# Altium PCB PCB1.PcbDoc
Units mm, origin at the board's own origin, x right, y up, seen from the top; angles counter-clockwise.
Board outline 48.54 x 47.62 mm, 2 copper layers (Top Layer, Bottom Layer); 38 components, 34 nets, 197 pads, 33 vias.
Unrouted connection lines stored in the file: 2.
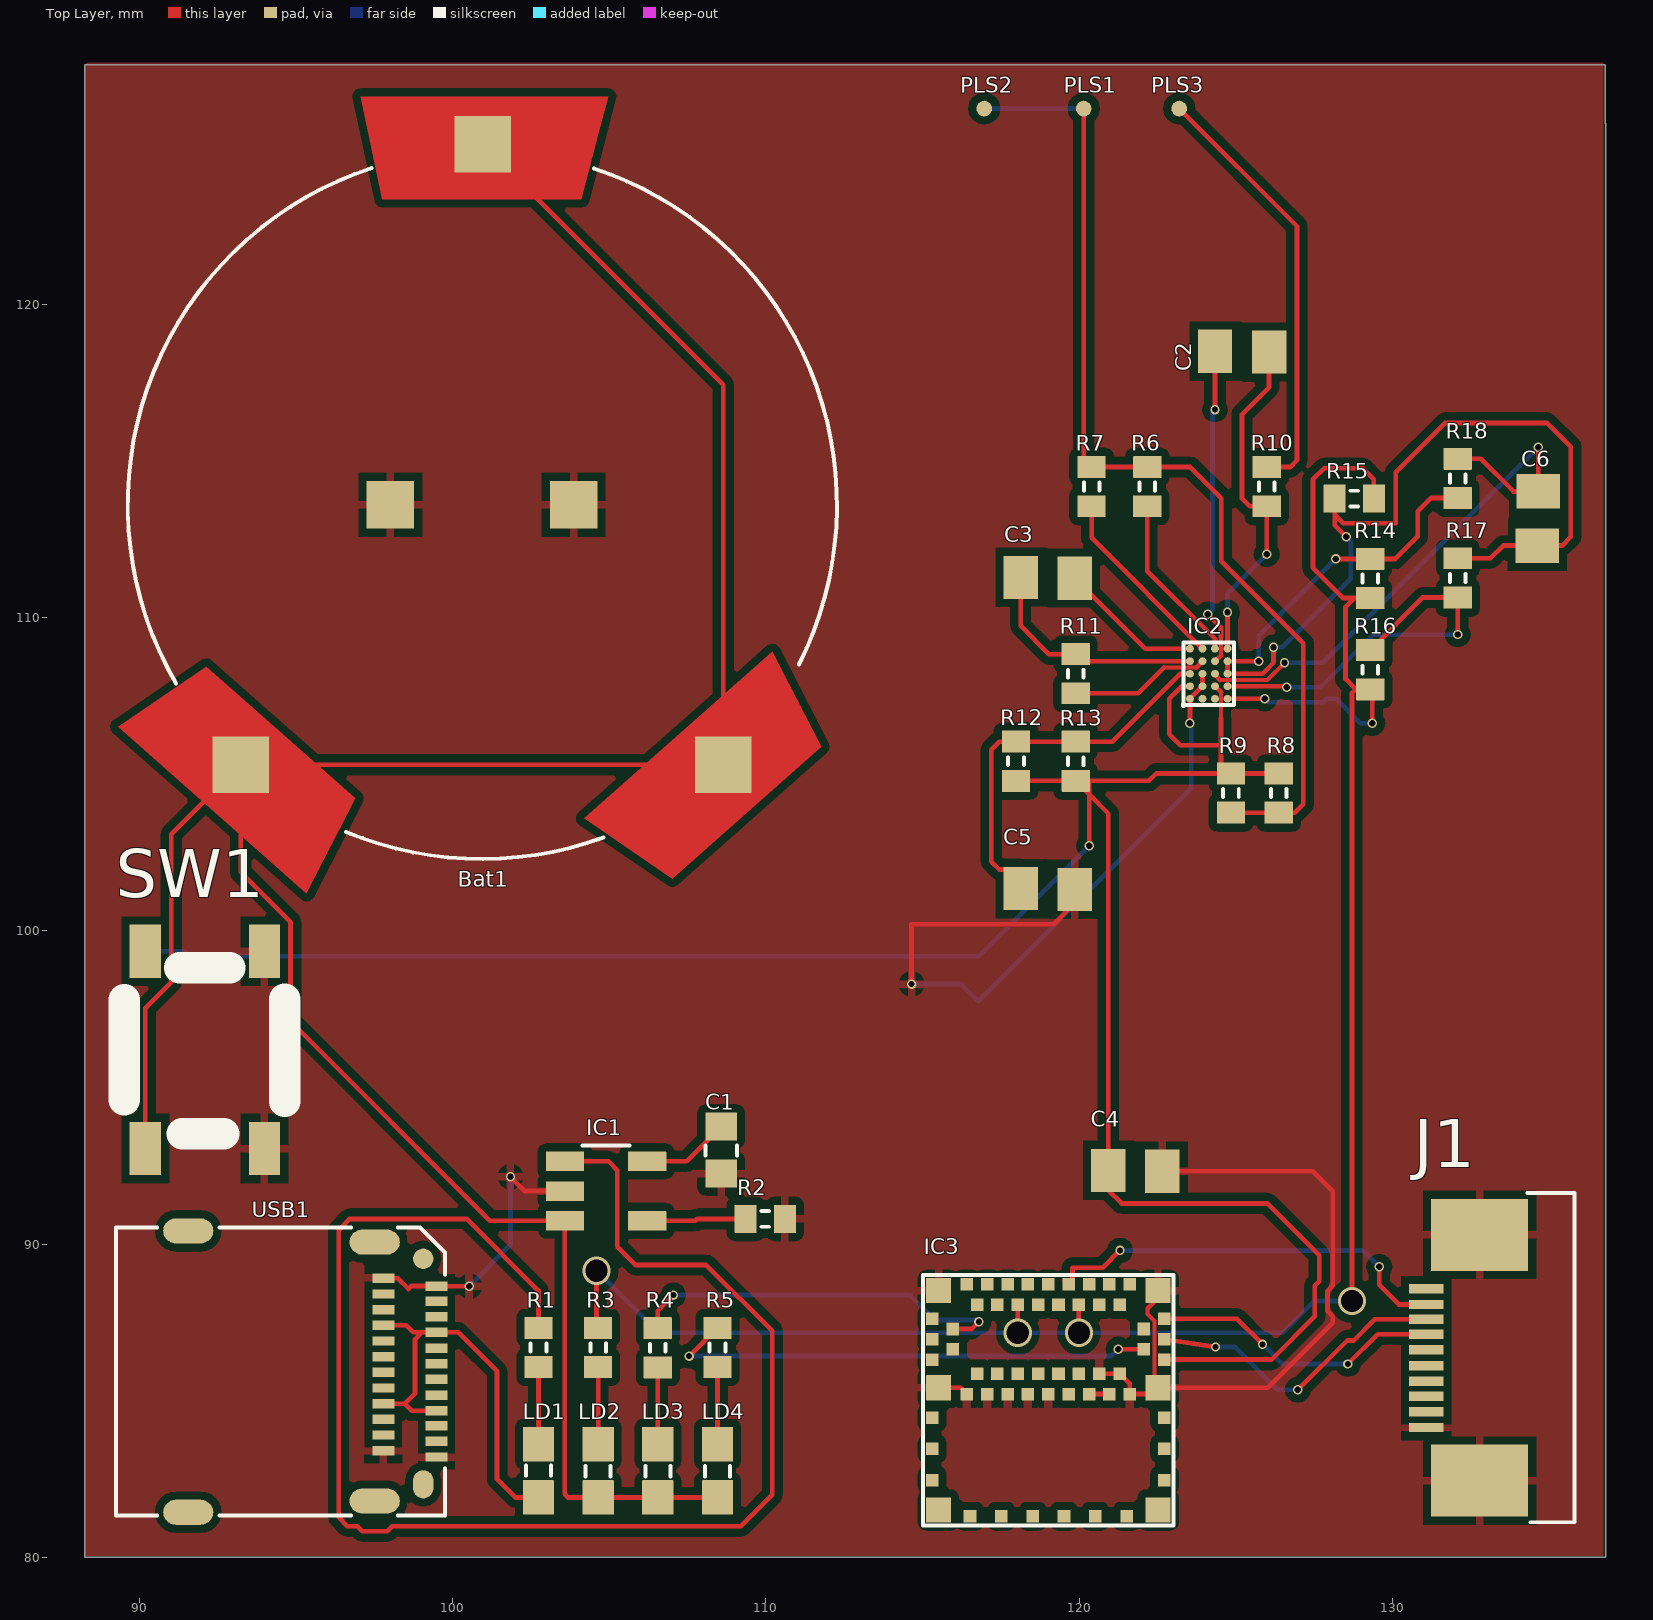
[diagram p0: Top Layer view]
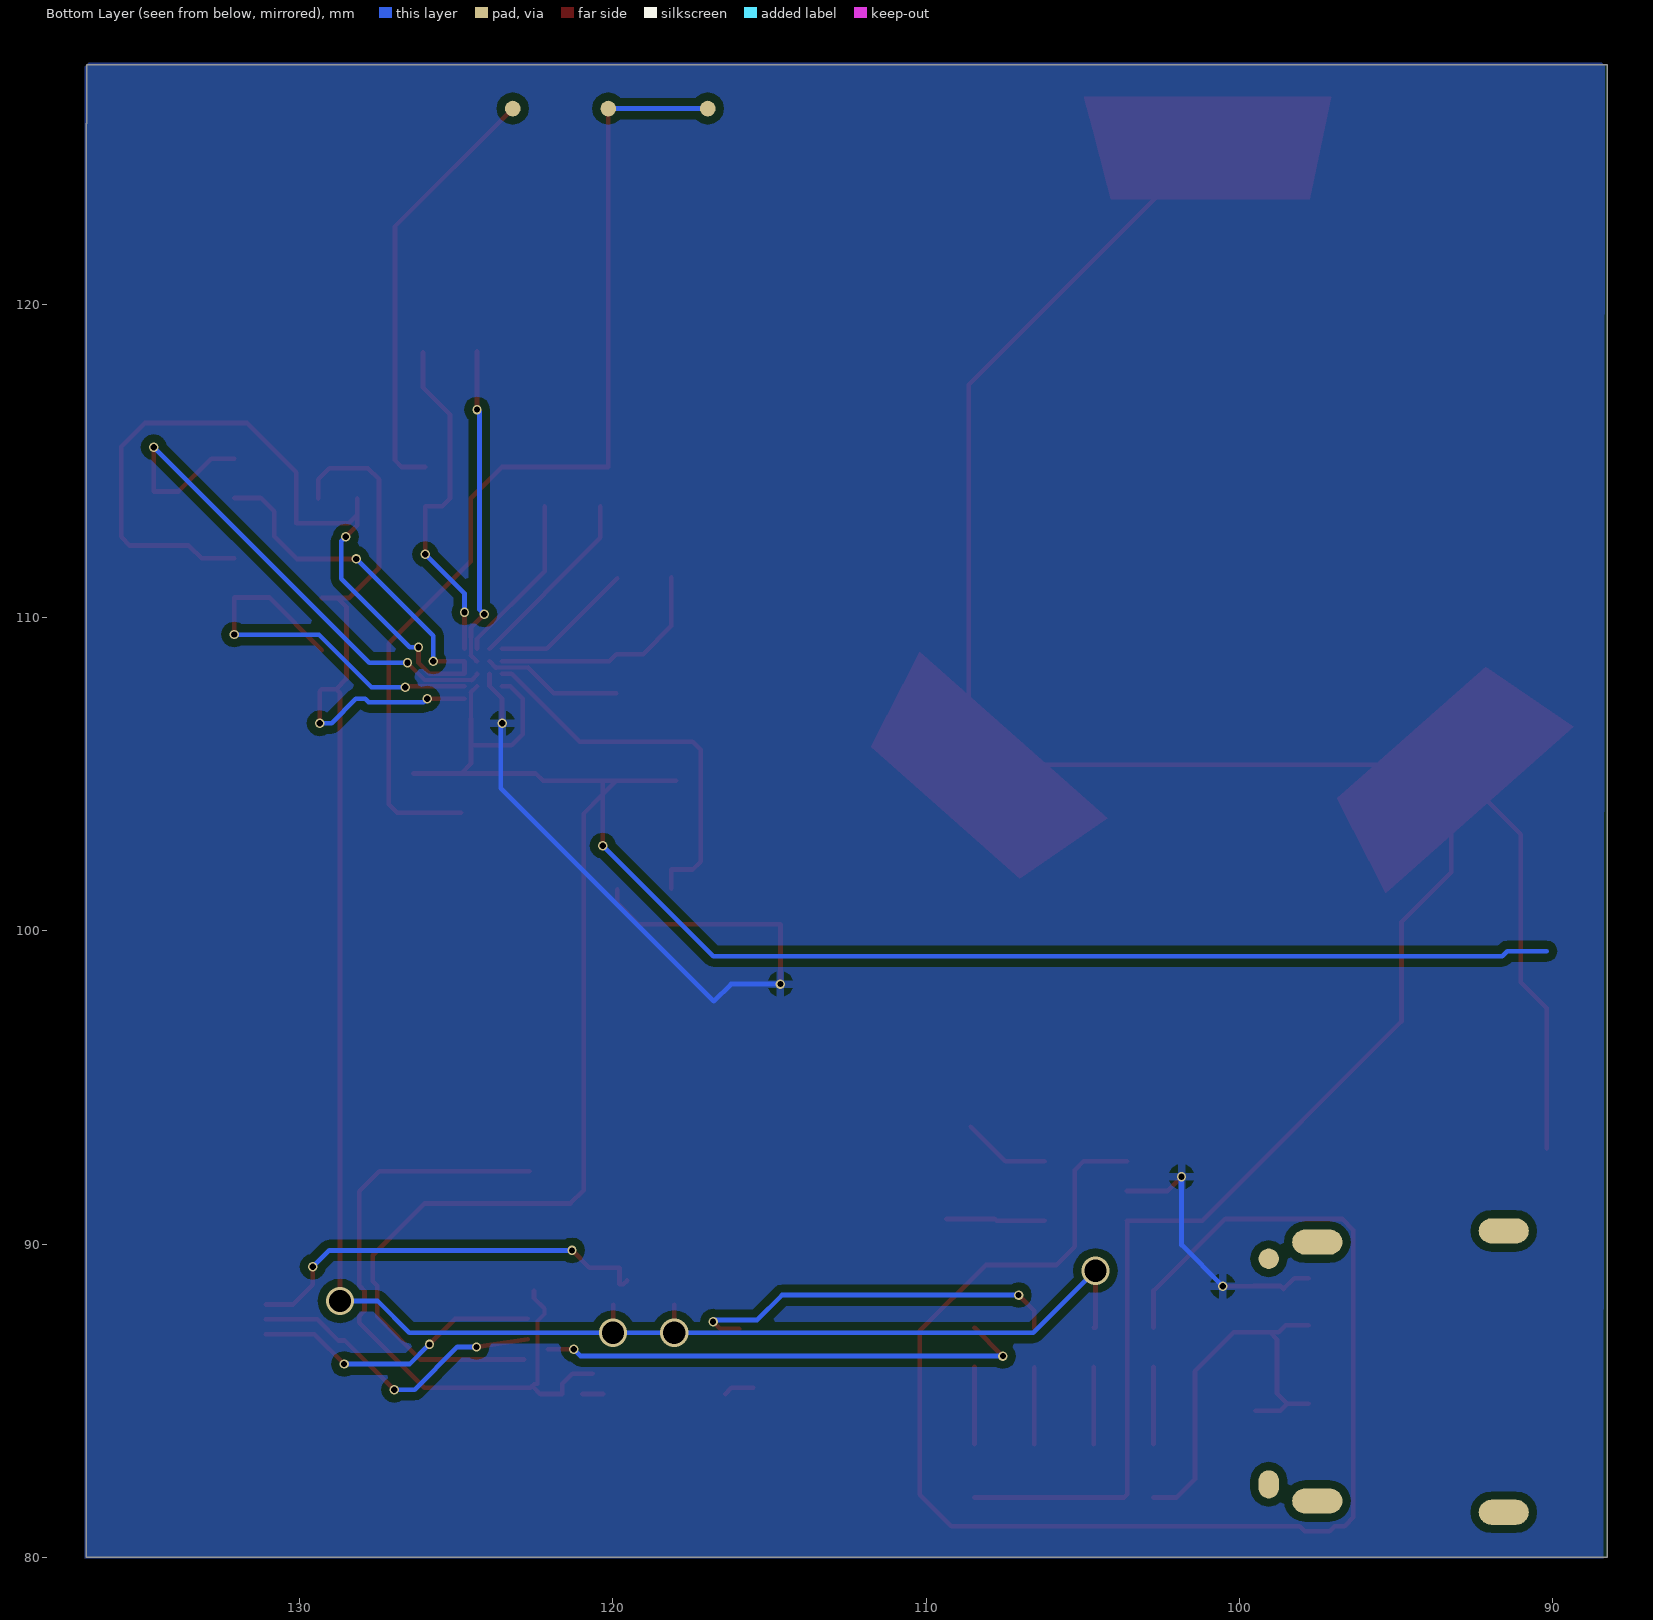
[diagram p1: Bottom Layer view, seen from below]
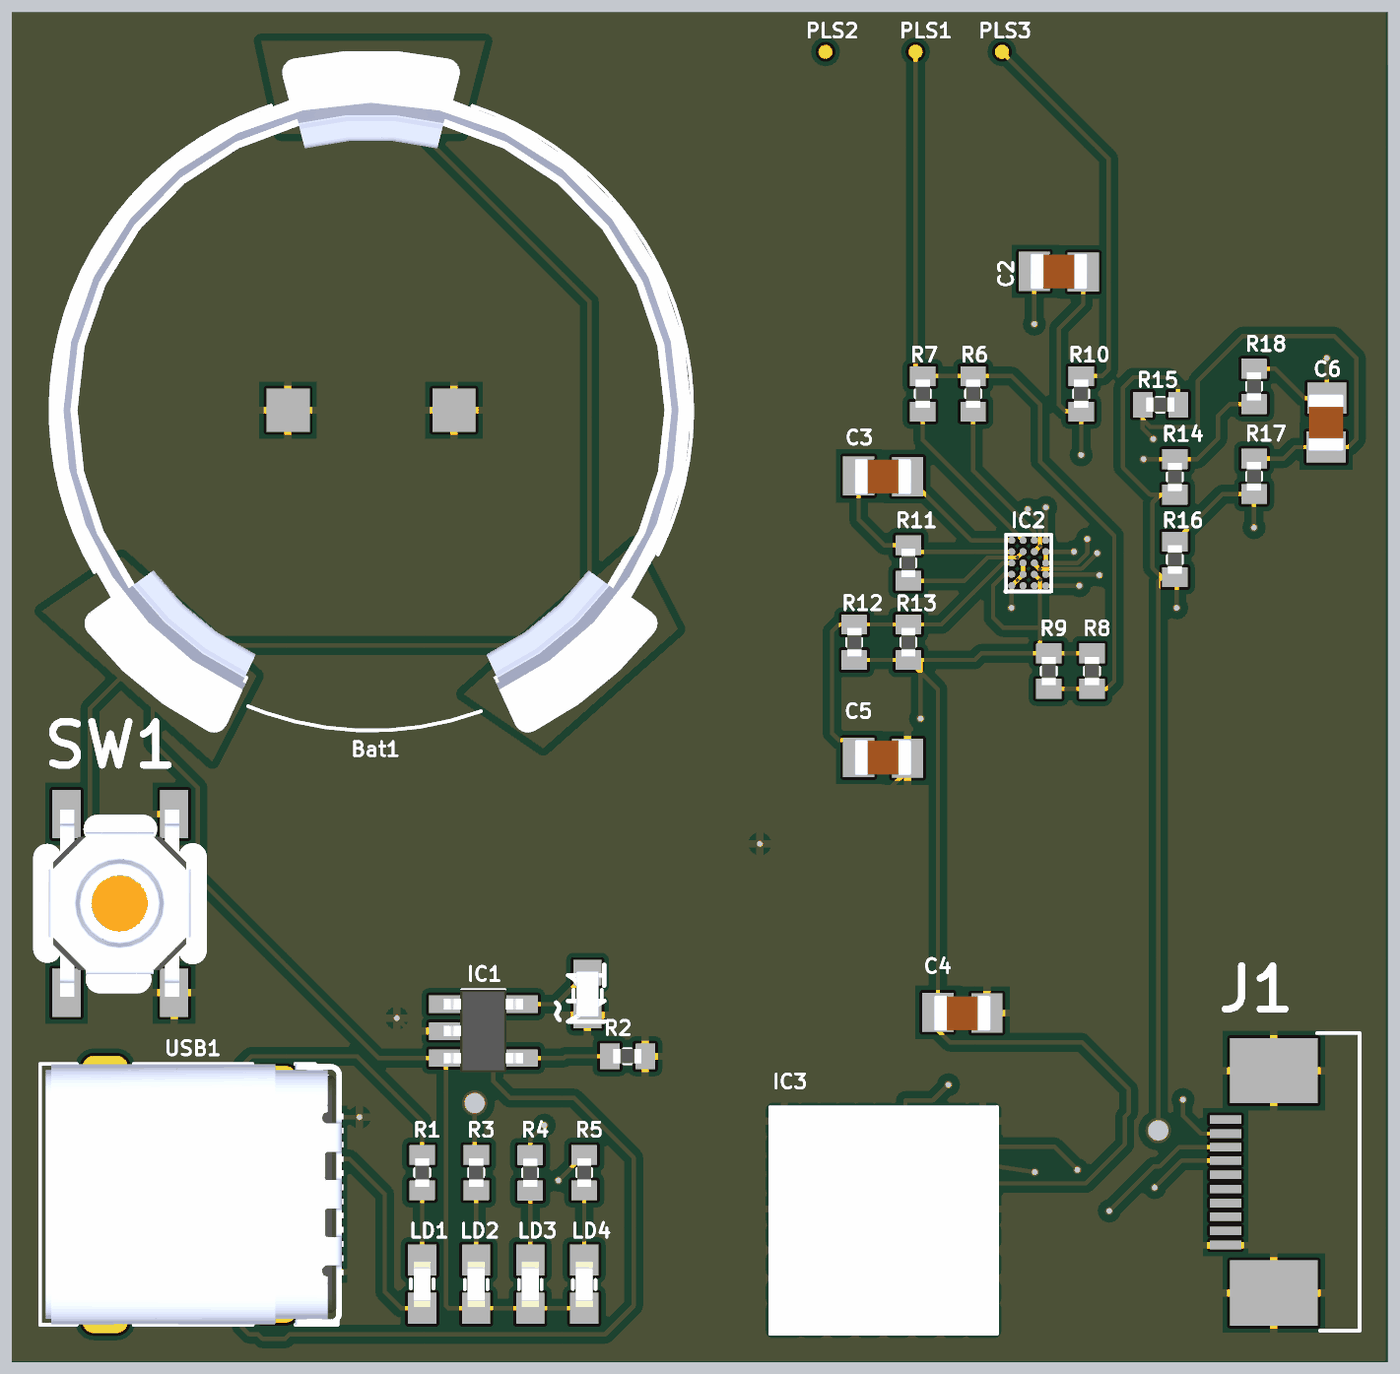
[diagram p2: 3D render of the assembled board from above, using the file's embedded part models]

## Layer stack, top to bottom
Top Solder: solder mask 0.0102, Solder Resist, Dk 3.5
Top Layer: signal copper 0.0356
Dielectric 1: dielectric 0.32, FR-4, Dk 4.8
Bottom Layer: signal copper 0.0356
Bottom Solder: solder mask 0.0102, Solder Resist, Dk 3.5

## Board outline
88.265,80.01 136.8,80.01 136.8,125.751 136.79,125.761 136.79,127.635 88.265,127.635

## Design rules (kind name [scope] priority, off if disabled: settings)
Clearance [All] p1: gap=0.254 ignorepadtopadclearanceinfootprint=FALSE except(0: Arc-Hole Track-Hole SMDPad-Hole THPad-Hole Via-Hole Fill-Hole Poly-Hole Region-Hole Text-Hole)
PolygonConnect [All] p1: connectstyle=Relief reliefconductorwidth=0.254 reliefentries=4 polygonreliefangle="90 Angle" airgapwidth=0.254
RoutingVias [All] p1: holewidth=0.711 width=0.9 viastyle="Through Hole" minholewidth=0.711 minwidth=0.9 maxholewidth=0.711 maxwidth=0.9
SolderMaskExpansion [All] p1: expansion=0.102 soldermaskfromhole=TRUE
Width Width_1 [All] p1: maxlimit=0.15 minlimit=0.15 preferedwidth=0.15
Width [InNet('VCC')] p2: maxlimit=0.2 minlimit=0.2 preferedwidth=0.2
30 further rules are at their usual default settings.

## Components (designator, comment, footprint, x,y, rotation, side; value= is the part's Value field where it differs from the comment)
Bat1 "Li-Ion" LI-ion 100.94,113.595 r0 top
C2 "1nF" Capac 125.196,118.491 r0 top
C3 "0.22nF" Capac 118.999,111.252 r180 top
C4 "0.1uF" Capac 121.793,92.329 r180 top
C5 "0.1uF" Capac 118.999,101.346 r0 top
C6 "22nF" Capac 134.62,113.157 r90 top
IC1 "LTC4054" LTC4054 104.902,91.694 r0 top
IC2 "AD8233" AD8233 123.533,107.404 r90 top
IC3 "ISP1507" ISP1507 115.014,89.017 r0 top
J1 "1-1734592-0" 1-1734592-0 131.075,86.375 r90 top
LD1 "G" LED 102.743,82.766 r270 top
LD2 "B" LED 104.648,82.766 r90 top
LD3 "G" LED 106.553,82.766 r90 top
LD4 "R" LED 108.458,82.766 r90 top
PLS1 "LA" output 120.142,126.238 r90 top
PLS2 "RA" output 116.967,126.238 r90 top
PLS3 "RL" output 123.19,126.238 r90 top
R1 "Resistor" "Resistor 1" 102.743,86.703 r90 top
R2 "Resistor" "Resistor 1" 109.982,90.805 r0 top
R3 "820R" "Resistor 1" 104.648,86.703 r90 top
R4 "680R" "Resistor 1" 106.553,86.693 r90 top
R5 "2.2K" "Resistor 1" 108.458,86.703 r90 top
R6 "180R" "Resistor 1" 122.174,114.173 r90 top
R7 "180R" "Resistor 1" 120.396,114.173 r90 top
R8 "10M" "Resistor 1" 126.365,104.394 r90 top
R9 "10M" "Resistor 1" 124.841,104.394 r90 top
R10 "360K" "Resistor 1" 125.984,114.173 r90 top
R11 "10M" "Resistor 1" 119.888,108.204 r90 top
R12 "10M" "Resistor 1" 117.983,105.41 r270 top
R13 "10M" "Resistor 1" 119.888,105.41 r270 top
R14 "1M" "Resistor 1" 129.286,111.242 r270 top
R15 "1M" "Resistor 1" 128.778,113.792 r0 top
R16 "1M" "Resistor 1" 129.286,108.331 r270 top
R17 "100K" "Resistor 1" 132.08,111.262 r270 top
R18 "100K" "Resistor 1" 132.08,114.437 r90 top
SW1 "Button" Button 92.1,96.2 r90 top
USB1 "USB Type C" "Type C" 98.767,85.934 r270 top
С1 "capacitor 10uf" CAPAC10 108.575,93 r90 top

## Footprints (in the part's own frame and the unit in brackets; to place one, negate y for a bottom-side part, rotate by r counter-clockwise, add the part's x,y. Pads: shape width x height; smd on the part's side, far side on the other; paste and mask are expansions set on the pad)
1-1734592-0 [mm]
  rect 0.3x1.1 smd: 1(-2.225,0) 2(-1.725,0) 3(-1.225,0) 4(-0.75,0) 5(-0.25,0) 6(0.25,0) 7(0.75,0) 8(1.225,0) 9(1.7,0) 10(2.2,0)
  rect 2.3x3.1 smd: 11(-3.92,-1.7) 12(3.92,-1.7)
  silkscreen extent -5.25,-4.73 5.25,-3.22
AD8233 [mm]
  round 0.25 smd: A1(0,0) A2(0.4,0) A3(0.8,0) A4(1.2,0) A5(1.6,0) B1(0,-0.4) B2(0.4,-0.4) B3(0.8,-0.4) B4(1.2,-0.4) B5(1.6,-0.4) C1(0,-0.8) C2(0.4,-0.8) C3(0.8,-0.8) C4(1.2,-0.8) C5(1.6,-0.8) D1(0,-1.2) D2(0.4,-1.2) D3(0.8,-1.2) D4(1.2,-1.2) D5(1.6,-1.2)
  silkscreen extent -0.22,-1.4 1.8,0.22
Button [mm]
  rect 1.7x1 smd: 1(-3.15,1.9) 2(-3.15,-1.9) 3(3.15,1.9) 4(3.15,-1.9)
  silkscreen extent -2.68,-2.55 2.63,2.58, body extent -3.3,-2.47 3.3,2.53, height 1.45
Capac [mm]
  rect 1.1x1.38 smd: 1(-0.863,0) 2(0.863,-0.025)
  body extent -1,-0.62 1,0.63, height 1.43
CAPAC10 [mm]
  rrect3% 0.9x1 smd: 1(-0.75,0) 2(0.75,0)
  silkscreen extent -0.18,-0.5 0.15,0.5, body extent -0.8,-0.4 0.8,0.4, height 1
ISP1507 [mil]
  rrect3% 31.5x31.5 smd mask-15.75: 1(19.69,-19.68) 7(19.69,-141.73) 25(295.28,-141.73) 31(295.28,-19.68) 52(19.69,-295.27) 59(295.28,-295.27)
  rrect3% 15.75x15.75 smd mask-7.88: 2(11.81,-55.12) 3(37.4,-67.91) 4(11.81,-80.71) 5(37.4,-93.5) 6(11.81,-106.3) 8(55.12,-149.61) 9(67.91,-124.02) 10(80.71,-149.61) 11(93.5,-124.02) 12(106.3,-149.61) 13(119.09,-124.02) 14(131.89,-149.61) 15(144.69,-124.02) 16(157.48,-149.61) 17(170.28,-124.02) 18(183.07,-149.61) 19(195.87,-124.02) 20(208.66,-149.61) 21(221.46,-124.02) 22(234.25,-149.61) 23(247.05,-124.02) 24(259.84,-149.61) 26(303.15,-106.3) 27(277.56,-93.5) 28(303.15,-80.71) 29(277.56,-67.91) 30(303.15,-55.12) 32(259.84,-11.81) 33(247.05,-37.4) 34(234.25,-11.81) 35(221.46,-37.4) 36(208.66,-11.81) 37(195.87,-37.4) 38(183.07,-11.81) 39(170.28,-37.4) 40(157.48,-11.81) 41(144.69,-37.4) 42(131.89,-11.81) 43(119.09,-37.4) 44(106.3,-11.81) 45(93.5,-37.4) 46(80.71,-11.81) 47(67.91,-37.4) 48(55.12,-11.81) 49(11.81,-179.13) 50(11.81,-218.5) 51(11.81,-257.87) 53(59.06,-303.15) 54(98.43,-303.15) 55(137.8,-303.15) 56(177.17,-303.15) 57(216.54,-303.15) 58(255.91,-303.15) 60(303.15,-257.87) 61(303.15,-218.5) 62(303.15,-179.13)
  silkscreen extent 0,-315 315,0, body extent 0,-315 315,0, height 38
LED [mm]
  rrect3% 1.1x1 smd: 1(-0.85,0) 2(0.85,0)
  silkscreen extent -0.18,-0.4 0.15,0.4, body extent -0.8,-0.3 0.8,0.3, height 1.1
LI-ion [mm]
  rect 1.52x1.52 smd: 1(-2.925,0) 2(2.925,0)
  rect 1.8x1.8 smd: 3(0.025,11.5) 4(7.7,-8.3) 5(-7.7,-8.3)
  Top Layer region: -11.606,-7.084 -5.599,-12.398 -4.038,-9.374 -8.794,-5.166
  Top Layer region: 3.26,-10.011 9.267,-4.696 10.828,-7.721 6.072,-11.929
  Top Layer region: -3.875,13.025 4.025,13.025 3.75,11.975 3.175,9.75 -3.175,9.75
  silkscreen extent -11.3,-11.3 11.33,10.74, body extent -11.3,-11.37 11.31,12.7, height 4.65
LTC4054 [mm]
  rrect3% 1.22x0.62 smd: 1(-1.31,0.95) 2(-1.31,0) 3(-1.31,-0.95) 4(1.31,0.95) 5(1.31,-0.95)
  silkscreen extent -0.75,1.45 0.75,1.45, body extent -1.4,-1.45 1.4,1.45, height 0.9
output [mm]
  round 0.5 all layers, no hole: 1(0,0)
"Resistor 1" [mm]
  rrect3% 0.7x0.9 smd: 1(-0.625,0) 2(0.625,0)
  silkscreen extent -0.13,-0.25 0.13,0.25, body extent -0.5,-0.25 0.5,0.25, height 0.38
"Type C" [mm]
  round 0.65 all layers, no hole: 0(-3.6,0.3)
  rect 0.3x0.7 smd: A1(-2.725,0.725) A2(-2.25,0.725) A3(-1.75,0.725) A4(-1.25,0.725) A5(-0.75,0.725) A6(-0.25,0.725) A7(0.25,0.725) A8(0.75,0.725) A9(1.25,0.725) A10(1.725,0.725) A11(2.225,0.725) A12(2.725,0.725) B1(-2.975,-0.975) B2(-2.475,-0.975) B3(-1.975,-0.975) B4(-1.475,-0.975) B5(-0.975,-0.975) B6(-0.475,-0.975) B7(0.025,-0.975) B8(0.525,-0.975) B9(1.025,-0.975) B10(1.525,-0.975) B11(2.025,-0.975) B12(2.525,-0.975)
  oval 0.9x0.65 all layers, no hole: none(3.6,0.3)
  oval 0.8x1.6 all layers, no hole: SH1(-4.13,-1.25) SH2(-4.49,-7.2) SH3(4.49,-7.2) SH4(4.13,-1.25)
  silkscreen extent -4.6,-9.5 4.6,1, body extent -4.6,-9.3 4.6,1.2, height 3.18

## Part data
C2 C3 C4 C5 C6: library part "capacitor 1uf"
LD1 LD2 LD3 LD4: library part led
PLS1 PLS2 PLS3: library part Output
R3 R4 R5 R6 R7 R8 R9 R10 R11 R12 R13 R14 R15 R16 R17 R18: library part Resistor

## Via types
v1: diameter 0.3, hole 0.2, Top Layer to Bottom Layer, tented both sides, 29 vias
v2: diameter 0.9, hole 0.711, Top Layer to Bottom Layer, tented both sides, 4 vias

## Nets (pads, with @x,y where several pads share a name; then routed paths per layer and width w, separated by ;. In a path a pad name is that pad's centre, name@x,y a point inside that pad or via, vN(x,y) a via of type N, cw(c..) or ccw(c..) an arc to the next point about the centre after c; other vN are vias at no path point)
GND: Bat1.1 Bat1.2 C4.1 C5.2 IC1.2 IC2.A1 IC2.B2 IC2.B3 IC3.1 IC3.7 IC3.8 IC3.10 IC3.12 IC3.14 IC3.16 IC3.21 IC3.23 IC3.24 IC3.25 IC3.31 J1.1 J1.11 J1.12 R2.2 SW1.2 SW1.4 USB1.A1 USB1.A12 USB1.B1 USB1.B12 С1.1 | length 55.8
  Top Layer w0.13: 122.185,87.95 122.185,87.765 122.4,87.55 122.4,85.531 IC3.25@122.514,85.531
  Top Layer w0.15: USB1.B1 98.257,88.909 98.596,88.57 98.689,88.663 USB1.A1@99.559,88.663 ; USB1.A1 v1(100.534,88.659) ; v1(101.85,92.15) 102.306,91.694 IC1.2 ; v1(114.65,98.3) 114.65,100.208 119.183,100.208 119.862,100.887 C5.2 ; IC3.7 116.214,85.417 IC3.8 ; IC3.21 IC3.23 121.614,85.542 IC3.24 122.314,85.217 IC3.25 ; 122.185,87.95 122.514,88.279 IC3.31 ; IC3.25@122.514,85.531 122.628,85.417 126.017,85.417 128.092,87.492 128.092,87.697 127.923,87.866 127.923,88.511 128.092,88.681 128.092,91.683 127.446,92.329 C4.1 ; v1@123.533,106.633 IC2.A1 IC2.B2 IC2.B3
  Bottom Layer w0.15: v1(100.534,88.659) 101.85,89.975 v1(101.85,92.15) ; v1(114.65,98.3) 116.225,98.3 116.775,97.75 123.575,104.55 123.575,106.575 v1(123.525,106.625)
NetBAT1_3: Bat1.3 Bat1.4 Bat1.5 IC1.3 LD2.1 LD3.1 LD4.1 SW1.1 | length 85.8
  Top Layer w0.15: SW1.1 90.2,97.535 91.029,98.364 91.029,103.084 Bat1.5 ; Bat1.3 108.64,117.42 Bat1.4 Bat1.5 ; IC1.3 IC1.3@103.581,90.744 ; LD4.1 LD3.1 LD2.1 103.683,81.916 103.581,82.017 IC1.3@103.581,90.744 ; Bat1.5 93.24,101.871 94.833,100.278 94.833,97.105 101.194,90.744 IC1.3@103.581,90.744
NetC2_1: C2.1 IC2.C4 | length 10.3
  Top Layer w0.13: 124.525,108.796 124.525,109.35
  Top Layer w0.15: v1(124.1,110.1) 124.525,109.675 124.525,109.35 ; v1(124.333,116.633) C2.1 ; IC2.C4@124.354,108.604 IC2.C4 124.525,108.796
  Bottom Layer w0.15: v1(124.1,110.1) 124.254,110.254 124.254,116.554 v1(124.333,116.633)
NetC2_2: C2.2 IC2.D5 R10.1 | length 11
  Top Layer w0.15: IC2.D5 v1(124.733,110.167) ; v1(125.984,112.016) R10.1 125.441,113.548 125.197,113.792 125.197,116.484 126.059,117.347 C2.2
  Bottom Layer w0.15: v1(124.733,110.167) 124.733,110.765 v1(125.984,112.016)
NetC3_1: C3.1 IC2.A5 | length 4.6
  Top Layer w0.15: C3.1 122.11,109.004 IC2.A5
NetC3_2: C3.2 IC2.A4 R11.2 | length 7.4
  Top Layer w0.15: C3.2 118.136,109.728 119.035,108.829 R11.2 120.113,108.604 IC2.A4
NetC4_2: C4.2 IC2.A2 IC2.C2 IC3.26 R8.2 R9.2 R12.2 R13.2 SW1.3 | length 77.3
  Top Layer w0.13: 124.525,106.775 124.525,107.612
  Top Layer w0.15: R12.2 R13.2 ; v1(120.32,102.718) 120.32,104.353 ; IC3.26@122.823,86.319 126.144,86.319 127.519,87.694 127.519,88.679 127.658,88.818 127.658,89.642 126,91.3 121.35,91.3 120.93,91.72 C4.2 120.93,103.743 120.32,104.353 ; IC2.A2 123.279,107.804 122.875,107.4 122.875,106.275 123.225,105.925 124.525,105.925 ; IC2.C2 124.525,107.612 ; 124.525,106.775 124.525,105.925 ; R8.2 R9.2 ; R13.2 120.32,104.353 ; R13.2 R13.2@120.32,104.785 ; 120.32,104.353 R13.2@120.32,104.785 ; R13.2@120.32,104.785 122.225,104.785 122.459,105.019 R9.2 ; 124.525,105.925 124.525,105.335 R9.2
  Bottom Layer w0.15: 90.2,99.35 91.45,99.35 91.613,99.187 116.789,99.187 v1(120.32,102.718)
NetC5_1: C5.1 IC2.A3 R12.1 R13.1 | length 12.6
  Top Layer w0.15: C5.1 118.136,101.956 117.45,101.956 117.196,102.21 117.196,105.781 117.45,106.035 R12.1 R13.1 121.06,106.035 123.229,108.204 IC2.A3
NetC6_1: C6.1 IC2.D3 R15.1 R17.1 | length 25.2
  Top Layer w0.15: IC2.D3 125.854,108.204 126.2,108.55 v1(126.2,109.05) ; R15.1 128.153,113.274 ; v1(128.525,112.575) 128.153,112.947 128.153,113.274 ; R17.1 133.121,111.887 133.528,112.294 C6.1 135.408,112.294 135.687,112.573 135.687,115.443 134.925,116.205 131.674,116.205 130.099,114.63 130.099,113.005 128.422,113.005 128.153,113.274
  Bottom Layer w0.15: v1(126.2,109.05) 126.475,109.05 128.662,111.237 128.662,112.438 v1(128.525,112.575)
NetC6_2: C6.2 IC2.C3 R18.2 | length 17.9
  Top Layer w0.13: 124.5,108 126,108 v1(126.55,108.55)
  Top Layer w0.15: IC2.C3 124.333,108.167 124.5,108 ; R18.2 132.817,115.062 133.859,114.02 C6.2 v1(134.645,115.43)
  Bottom Layer w0.15: v1(126.55,108.55) 127.765,108.55 v1(134.645,115.43)
NetIC1_1: IC1.1 R1.2 | length 47.8
  Top Layer w0.15: R1.2 102.743,88.519 100.457,90.805 96.723,90.805 96.368,90.449 96.368,81.28 96.647,81.001 96.957,81.001 97.118,80.84 97.916,80.84 98.077,81.001 109.201,81.001 110.2,82 110.2,87.234 108.102,89.332 105.842,89.332 105.258,89.916 105.258,92.365 104.978,92.644 IC1.1
NetIC1_4: IC1.4 С1.2 | length 2.8
  Top Layer w0.15: IC1.4 107.469,92.644 С1.2
NetIC1_5: IC1.5 R2.1 | length 3.2
  Top Layer w0.15: IC1.5 107.747,90.744 107.808,90.805 R2.1
NetIC2_B4: IC2.B4 R11.1 | length 4.5
  Top Layer w0.14: 122.7,108.4 123.729,108.4
  Top Layer w0.15: R11.1 121.879,107.579 122.7,108.4 ; 123.729,108.4 IC2.B4
NetIC2_B5: IC2.B5 R7.1 | length 6
  Top Layer w0.15: R7.1 120.396,112.541 IC2.B5
NetIC2_C5: IC2.C5 R6.1 | length 5.4
  Top Layer w0.15: R6.1 122.174,111.476 124.333,109.317 IC2.C5
NetIC2_D1: IC2.D1 IC3.43 R14.2 R15.2 R16.2 | length 49.2
  Top Layer w0.15: v2(118.039,87.173) IC3.43 ; IC2.D1 v1(125.921,107.404) ; v2(128.702,88.189) 128.702,107.579 128.829,107.706 ; R14.2 128.778,110.617 ; v1(129.35,106.625) 129.35,107.642 R16.2 128.829,107.706 ; R15.2 129.403,114.402 129.047,114.757 127.813,114.757 127.457,114.402 127.457,111.582 128.422,110.617 128.778,110.617 ; 128.778,110.617 128.499,110.338 128.499,108.036 128.829,107.706
  Bottom Layer w0.15: v2(118.039,87.173) 126.492,87.173 127.508,88.189 v2(128.702,88.189) ; v1(125.921,107.404) 126.029,107.296 127.792,107.296 127.9,107.404 128.196,107.404 128.975,106.625 v1(129.35,106.625)
NetIC2_D2: IC2.D2 R16.1 R17.2 | length 12.7
  Top Layer w0.15: IC2.D2 126.596,107.804 v1(126.625,107.775) ; R16.1 130.967,110.637 R17.2 v1(132.08,109.455)
  Bottom Layer w0.15: v1(126.625,107.775) 127.7,107.775 129.375,109.45 132.075,109.45 v1(132.08,109.455)
NetIC2_D4: IC2.D4 R14.1 R18.1 | length 10.8
  Top Layer w0.15: 124.733,108.233 IC2.D4 v1(125.729,108.604) ; v1(128.183,111.867) R14.1 130.079,111.867 130.805,112.593 130.805,113.386 131.231,113.812 R18.1
  Bottom Layer w0.15: v1(125.729,108.604) 125.729,109.413 v1(128.183,111.867)
NetIC3_3: IC3.3 R4.2 | length 12.3
  Top Layer w0.15: R4.2 106.553,87.878 v1(107.05,88.375) ; IC3.3 116.567,87.292 v1(116.8,87.525)
  Bottom Layer w0.15: v1(107.05,88.375) 114.6,88.375 115.398,87.577 v1@116.8,87.577
NetIC3_20: IC3.20 IC3.22 | length 0.6
  Top Layer w0.15: IC3.20 IC3.22
NetIC3_27: IC3.27 R5.2 | length 15.9
  Top Layer w0.15: v1(107.55,86.429) 108.449,87.328 R5.2 ; v1(121.242,86.642) IC3.27
  Bottom Layer w0.15: v1(107.55,86.429) 121.029,86.429 v1(121.242,86.642)
NetIC3_28: IC3.28 J1.8 | length 9.9
  Top Layer w0.15: IC3.28 v1(124.349,86.719) ; v1(126.975,85.35) 128.55,86.925 128.754,86.925 129.429,87.6 J1.8
  Bottom Layer w0.15: v1(124.349,86.719) 124.956,86.719 126.325,85.35 v1(126.975,85.35)
NetIC3_30: IC3.30 J1.7 | length 9.3
  Top Layer w0.15: IC3.30 125.033,87.617 v1(125.85,86.8) ; v1(128.575,86.175) 129.525,87.125 J1.7
  Bottom Layer w0.15: v1@125.85,86.769 125.881,86.769 126.475,86.175 v1(128.575,86.175)
NetIC3_37: IC3.37 R3.2 | length 19
  Top Layer w0.15: v2(104.597,89.154) 104.597,87.328 R3.2 ; v2(119.99,87.173) IC3.37
  Bottom Layer w0.15: v2(104.597,89.154) 106.578,87.173 v2(119.99,87.173)
NetIC3_38: IC3.38 J1.9 | length 13.4
  Top Layer w0.15: IC3.38@119.543,88.838 IC3.38 119.785,88.717 119.785,89.246 120.746,89.246 v1(121.3,89.8) ; v1(129.575,89.275) 129.575,88.7 130.2,88.075 J1.9
  Bottom Layer w0.15: v1(121.3,89.8) 129.05,89.8 v1(129.575,89.275)
NetLD1_1: LD1.1 R1.1 | length 2.5
  Top Layer w0.15: LD1.1 R1.1
NetLD1_2: LD1.2 USB1.A4 USB1.A9 USB1.B4 USB1.B9 | length 13.5
  Top Layer w0.15: USB1.B9 98.476,84.909 ; USB1.B4 98.527,87.409 98.752,87.184 99.02,87.184 ; USB1.A9 98.701,84.684 98.476,84.909 ; LD1.2 102.006,81.916 101.422,82.499 101.422,85.939 100.178,87.184 USB1.A4 99.02,87.184 ; 98.476,84.909 98.806,85.239 98.806,86.97 99.02,87.184
NetLD2_2: LD2.2 R3.1 | length 2.5
  Top Layer w0.15: LD2.2 R3.1
NetLD3_2: LD3.2 R4.1 | length 2.5
  Top Layer w0.15: LD3.2 R4.1
NetLD4_2: LD4.2 R5.1 | length 2.5
  Top Layer w0.15: LD4.2 R5.1
NetPLS1_1: PLS1.1 PLS2.1 R6.2 R7.2 R8.1 R9.1 | length 32.7
  Top Layer w0.15: PLS1.1 120.142,114.798 R7.2 R6.2 123.546,114.798 124.536,113.807 124.536,111.785 127.152,109.169 127.152,104.038 126.883,103.769 R8.1 R9.1
  Bottom Layer w0.15: PLS2.1 PLS1.1
NetPLS3_1: PLS3.1 R10.2 | length 13.8
  Top Layer w0.15: PLS3.1 126.949,122.479 126.949,115.011 126.736,114.798 R10.2
VCC: J1.2 J1.3
pads on no net: IC2.B1 IC2.C1 IC3.2 IC3.4 IC3.5 IC3.6 IC3.9 IC3.11 IC3.13 IC3.15 IC3.17 IC3.18 IC3.19 IC3.29 IC3.32 IC3.33 IC3.34 IC3.35 IC3.36 IC3.39 IC3.40 IC3.41 IC3.42 IC3.44 IC3.45 IC3.46 IC3.47 IC3.48 IC3.49 IC3.50 IC3.51 IC3.52 IC3.53 IC3.54 IC3.55 IC3.56 IC3.57 IC3.58 IC3.59 IC3.60 IC3.61 IC3.62 J1.4 J1.5 J1.6 J1.10 USB1.0 USB1.A2 USB1.A3 USB1.A5 USB1.A6 USB1.A7 USB1.A8 USB1.A10 USB1.A11 USB1.B2 USB1.B3 USB1.B5 USB1.B6 USB1.B7 USB1.B8 USB1.B10 USB1.B11 USB1.none USB1.SH1 USB1.SH2 USB1.SH3 USB1.SH4

## Polygon pours and split planes (outlines as drawn)
GND on Top Layer "Bottom layer" (solid, pour order 17): 88.275,127.625 88.35,127.7 136.725,127.7 136.725,80.1 136.775,80.05 88.275,80.05
GND on Bottom Layer "Bottom layer" (solid, pour order 19): 88.35,127.7 136.725,127.7 136.85,127.575 136.85,79.975 88.4,79.975

## Silkscreen, mask and mechanical layers (free items; w line width, h text height)
Mechanical 1:
  the board outline again, w1